# EAGLE board CheetahBoosterMCU (EAGLE 7.6.0)

Size 50 x 79 mm. Coordinates in mm from the lower left corner, seen from the top.
Outline: 31,8 31,0 19,0 19,8 2,8 arc-90 0,10 0.17,77.34 arc-90 2,79 48,79 arc-90 50,77.17 50,10 arc-90 48,8 31,8
Copper layers (1*16): Top 0.035mm / dielectric 1.5mm / Bottom 0.035mm
Design rules "default": minimum track width 10mil, minimum drill 24mil, track to track 8mil, track to pad 8mil, pad to pad 8mil, via to via 8mil, smd to smd 8mil, copper to edge 40mil, drill to drill 8mil, minimum pad ring 10mil, minimum via ring 8mil, stop-mask expansion 4mil, vias tented up to drill 0mil, thermal gap 10mil

## Footprints (pad centres in the part's own frame; a part is rotated, then mirrored left to right if it is on the bottom)
1X12 = drill 1.016 long: 1 -13.97,0; 2 -11.43,0; 3 -8.89,0; 4 -6.35,0; 5 -3.81,0; 6 -1.27,0; 7 1.27,0; 8 3.81,0; 9 6.35,0; 10 8.89,0; 11 11.43,0; 12 13.97,0
1X04 = drill 1.016 long: 1 -3.81,0; 2 -1.27,0; 3 1.27,0; 4 3.81,0
USB-A-PCB = smd 7.5 x 1.5: 5V -0.2,-3.5; GND -0.2,3.5 | smd 6.5 x 1: USB_M 0.3,-1; USB_P 0.3,1
1X08 = drill 1.016 long: 1 -8.89,0; 2 -6.35,0; 3 -3.81,0; 4 -1.27,0; 5 1.27,0; 6 3.81,0; 7 6.35,0; 8 8.89,0
1X06 = drill 1.016 octagon: 1 -6.35,0; 2 -3.81,0; 3 -1.27,0; 4 1.27,0; 5 3.81,0; 6 6.35,0
R1206 = smd 1.6 x 1.803: 1 -1.422,0; 2 1.422,0
SIP10 = drill 0.6 long: 1 -11.46,0; 2 -8.92,0; 3 -6.38,0; 4 -3.84,0; 5 -1.3,0; 6 1.24,0; 7 3.78,0; 8 6.32,0; 9 8.86,0; 10 11.4,0

## Placement (x,y rotation side)
ARDUINO_PRO_MINI_LEFT  [1X12]  7.5,26.5 270 top
ARDUINO_PRO_MINI_RIGHT  [1X12]  22.2,26.5 270 top
BUTTON_1  [1X04]  47.33,48.66 90 top
BUTTON_2  [1X04]  47.33,62.34 90 top
JP1  USBPCB  [USB-A-PCB]  24.99,4.88 90 top
JP2  [1X08]  40.7,26.5 270 top
JP3  [1X08]  33,26.5 90 top
JP_PROGRAMMING  [1X06]  2,54 90 top
R_BUT1_PD_1K  [R1206]  37.89,44 0 top
R_BUT1_PD_1K1  [R1206]  11,44 0 top
RN1  [SIP10]  47.5,23 90 top

## Library data of the parts
ARDUINO_PRO_MINI_LEFT ARDUINO_PRO_MINI_RIGHT JP_PROGRAMMING R_BUT1_PD_1K R_BUT1_PD_1K1 = adafruit
BUTTON_1 BUTTON_2 JP2 JP3 = pinhead
JP1 = SparkFun-Connectors
RN1 = resistor-sip

## Nets
A0: ARDUINO_PRO_MINI_LEFT.5
A1: ARDUINO_PRO_MINI_LEFT.6 BUTTON_2.4 R_BUT1_PD_1K1.2
A2: ARDUINO_PRO_MINI_LEFT.7 BUTTON_1.4 R_BUT1_PD_1K.2
A3: ARDUINO_PRO_MINI_LEFT.8
DOT_NOT_USE: RN1.10
G2: ARDUINO_PRO_MINI_RIGHT.8 JP3.1
G3: ARDUINO_PRO_MINI_RIGHT.7 JP3.2
G4: ARDUINO_PRO_MINI_RIGHT.6 JP3.3
G5: ARDUINO_PRO_MINI_RIGHT.5 JP3.4
G6: ARDUINO_PRO_MINI_RIGHT.4 JP3.5
G7: ARDUINO_PRO_MINI_RIGHT.3 JP3.6
G8: ARDUINO_PRO_MINI_RIGHT.2 JP3.7
G9: ARDUINO_PRO_MINI_RIGHT.1 JP3.8
G10: ARDUINO_PRO_MINI_LEFT.1
G11_MOSI: ARDUINO_PRO_MINI_LEFT.2 JP_PROGRAMMING.6
G12_MISO: ARDUINO_PRO_MINI_LEFT.3 JP_PROGRAMMING.5
G13_SCK: ARDUINO_PRO_MINI_LEFT.4 JP_PROGRAMMING.4
GND: ARDUINO_PRO_MINI_LEFT.11 JP1.GND JP_PROGRAMMING.1 R_BUT1_PD_1K1.1 R_BUT1_PD_1K.1 RN1.1
GND2: ARDUINO_PRO_MINI_RIGHT.9
R0: JP2.1 RN1.9
R1: JP2.2 RN1.8
R2: JP2.3 RN1.7
R3: JP2.4 RN1.6
R4: JP2.5 RN1.5
R5: JP2.6 RN1.4
R6: JP2.7 RN1.3
R7: JP2.8 RN1.2
RAW: ARDUINO_PRO_MINI_LEFT.12
RST: ARDUINO_PRO_MINI_LEFT.10 JP_PROGRAMMING.3
RST_2: ARDUINO_PRO_MINI_RIGHT.10
RXI: ARDUINO_PRO_MINI_RIGHT.11
TXO: ARDUINO_PRO_MINI_RIGHT.12
VCC: ARDUINO_PRO_MINI_LEFT.9 BUTTON_1.1 BUTTON_2.1 JP1.5V JP_PROGRAMMING.2

## Tracks (layer width: path | path; a pad name or v marks a point on that pad's centre or on a via)
A1  (2 unrouted)
A2  (2 unrouted)
G2  (1 unrouted)
G3  (1 unrouted)
G4  (1 unrouted)
G5  (1 unrouted)
G6  (1 unrouted)
G7  (1 unrouted)
G8  (1 unrouted)
G9  (1 unrouted)
G11_MOSI  (1 unrouted)
G12_MISO  (1 unrouted)
G13_SCK  (1 unrouted)
GND  (5 unrouted)
R0  (1 unrouted)
R1  (1 unrouted)
R2  (1 unrouted)
R3  (1 unrouted)
R4  (1 unrouted)
R5  (1 unrouted)
R6  (1 unrouted)
R7  (1 unrouted)
RST  (1 unrouted)
VCC  (4 unrouted)

## Text on the board
tNames: Chris, Eric, Erion, Frederic, Jeff, Katherine, Min. | G11_MOSI | G12_MISO | G13_SCK | RST | VCC | GND | C:/DVT/MadeInTheUSB.PCB/EXTENSIONS/Analog/CheetahBoosterMCU/Rambo Gray.bmp | Available in 2020 | G10 | G9 | *G11_MOSI | *G8 | *G12_MISO | G7 | *G13_SCK | G6 | A0 | G5 | A1 | G4 | A2 | G3 | A3 | G2 | *VCC | GND | *RST | *RST | *GND | RXI | RAW | TXO | GND | VCC
bNames: https://bit.ly/2QiYI4l | PCB v1 - 2020.03 - Cheetah Booster /mcu | www.FredericTorres.com